# EAGLE board BoB_modul (EAGLE 7.7.0)
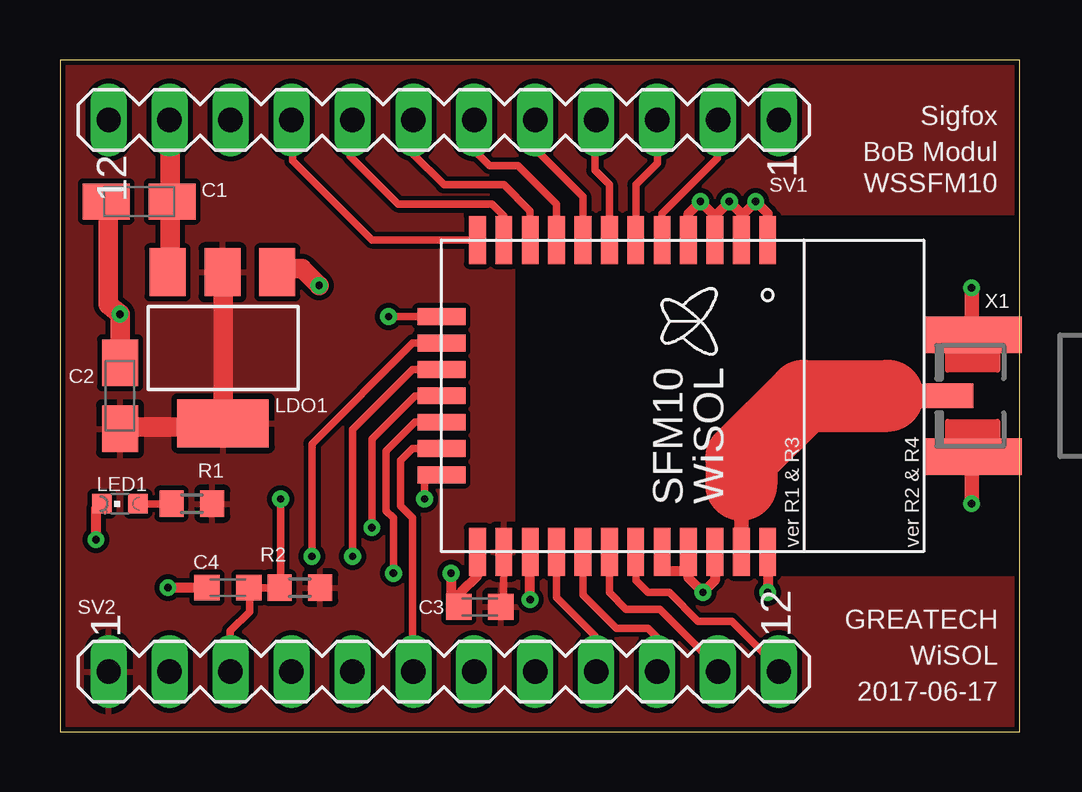
[diagram p0: board, top side]
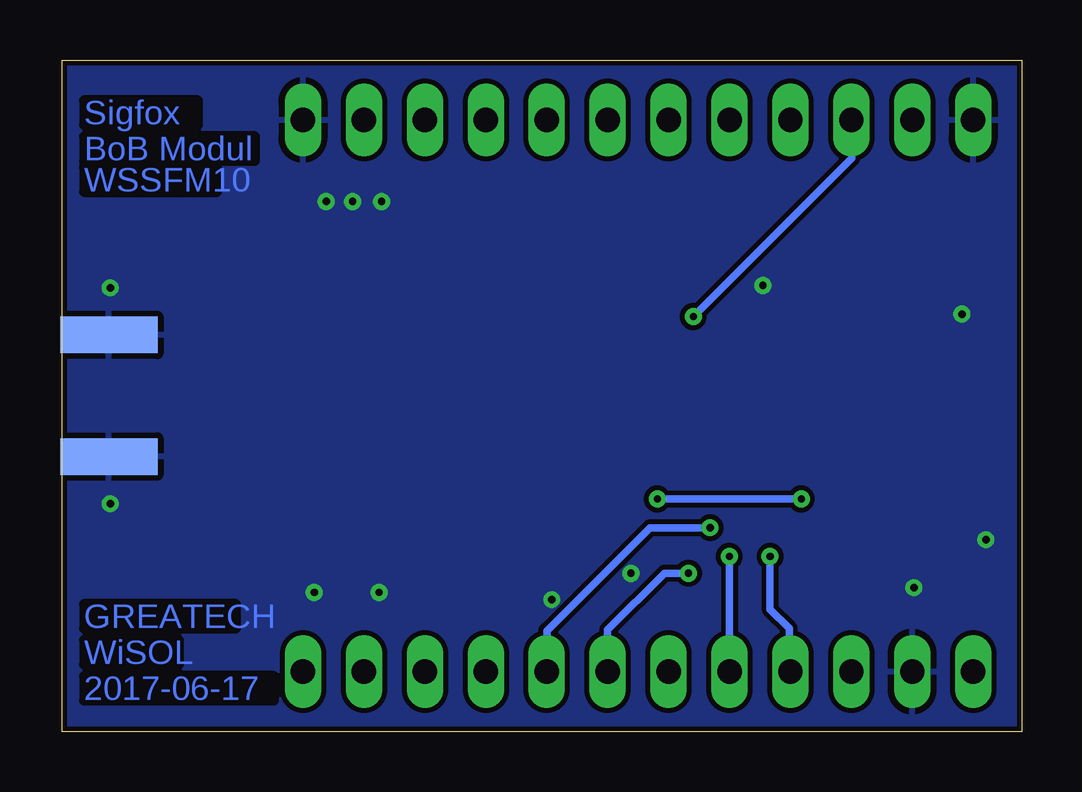
[diagram p1: board, bottom side, seen from below]

Size 40 x 28 mm. Coordinates in mm from the lower left corner, seen from the top.
Outline: 0,28 0,0 40,0 40,28 0,28
Copper layers (1*16): Top 0.035mm / dielectric 1.5mm / Bottom 0.035mm
Design rules "default *": minimum track width 10mil, minimum drill 24mil, track to track 8mil, track to pad 8mil, pad to pad 8mil, via to via 8mil, smd to smd 8mil, copper to edge 8mil, drill to drill 8mil, minimum pad ring 10mil, minimum via ring 8mil, stop-mask expansion 4mil, vias tented up to drill 0mil, thermal gap 10mil

## Footprints (pad centres in the part's own frame; a part is rotated, then mirrored left to right if it is on the bottom)
A/3216-18R = smd 1.95 x 1.5: + 1.375,0; - -1.375,0
C0603K = smd 1.05 x 1.08: 1 -0.875,0; 2 0.875,0
SOT223 = smd 1.499 x 2.007: 1 -2.261,-3.15; 2 0.025,-3.15; 3 2.311,-3.15 | smd 3.81 x 2.007: 4 0,3.15
CHIPLED_0603 = smd 0.8 x 0.8: A 0,-0.75; C 0,0.75
R0603 = smd 1 x 1.1: 1 -0.85,0; 2 0.85,0
MA12-1 = drill 1.016 long: 1 -13.97,0; 2 -11.43,0; 3 -8.89,0; 4 -6.35,0; 5 -3.81,0; 6 -1.27,0; 7 1.27,0; 8 3.81,0; 9 6.35,0; 10 8.89,0; 11 11.43,0; 12 13.97,0
WSSFM10 = smd 2 x 0.7: P$1 -6.5,6; P$2 -6.5,4.9; P$3 -6.5,3.8; P$4 -6.5,2.7; P$5 -6.5,1.6; P$6 -6.5,0.5; P$7 -6.5,-0.6; P$8 -6.5,-1.7; P$9 -6.5,-2.8; P$10 -6.5,-3.9; P$11 -6.5,-5; P$12 -6.5,-6.1; P$20 6.5,-6.1; P$21 6.5,-5; P$22 6.5,-3.9; P$23 6.5,-2.8; P$24 6.5,-1.7; P$25 6.5,-0.6; P$26 6.5,0.5; P$27 6.5,1.6; P$28 6.5,2.7; P$29 6.5,3.8; P$30 6.5,4.9; P$31 6.5,6 | smd 0.7 x 2: P$13 -3.3,-7.6; P$14 -2.2,-7.6; P$15 -1.1,-7.6; P$16 0,-7.6; P$17 1.1,-7.6; P$18 2.2,-7.6; P$19 3.3,-7.6
SMA_EDGELAUNCH_UFL = smd 4.064 x 1.524: GND@1 2.032,-2.54; GND@2 2.032,2.54 | smd 4.064 x 1.524 bottom: GND@3 2.032,2.54; GND@4 2.032,-2.54 | smd 2.032 x 1.016: P 3.048,0

## Placement (x,y rotation side)
C1  10u  [A/3216-18R]  3.3,22.1 0 top
C2  10u  [A/3216-18R]  2.5,14 270 top
C3  100n  [C0603K]  17.5,5.2 180 top
C4  100n  [C0603K]  7,6 180 top
LDO1  AME8815BEGT  [SOT223]  6.8,16 180 top
LED1  [CHIPLED_0603]  2.5,9.5 90 top
R1  470  [R0603]  5.5,9.5 0 top
R2  100k  [R0603]  10,6 0 top
SV1  [MA12-1]  16,25.5 180 top
SV2  [MA12-1]  16,2.5 0 top
WSSFM10  SFM10  [WSSFM10]  23.5,14 270 top
X1  [SMA_EDGELAUNCH_UFL]  40.1,14 180 top

## Library data of the parts
C1-C4 R1 R2 = resistor
LDO1 = _Jochen_2016-10-02
LED1 = led
SV1 SV2 = con-lstb; OC_FARNELL: unknown; OC_NEWARK: unknown
WSSFM10 = WiSOL
X1 = adafruit_microbuilder

## Nets
3V3: C2.+ C3.1 LDO1.2 LDO1.4 R1.2 R2.2 SV2.1 WSSFM10.P$21
5V: C1.+ LDO1.3 SV1.11
/RST: C4.1 R2.1 SV2.3 WSSFM10.P$19
CPU_LED: SV1.8 WSSFM10.P$11
DBG_CLK_TX_LED: SV2.7 WSSFM10.P$17
DBG_DATA_RX_LED: SV2.8 WSSFM10.P$16
DBG_EN_NC: SV2.6 WSSFM10.P$18
GND: C1.- C2.- C3.2 C4.2 LDO1.1 LED1.C SV1.1 SV1.12 SV2.2 WSSFM10.P$1 WSSFM10.P$2 WSSFM10.P$3 WSSFM10.P$4 WSSFM10.P$20 WSSFM10.P$22 WSSFM10.P$27 WSSFM10.P$28 WSSFM10.P$29 WSSFM10.P$31 X1.GND@1 X1.GND@2 X1.GND@3 X1.GND@4
GPIO0: SV2.9 WSSFM10.P$23
GPIO1: SV2.10 WSSFM10.P$24
GPIO2: SV2.11 WSSFM10.P$25
GPIO3: SV2.12 WSSFM10.P$26
GPIO4: SV1.7 WSSFM10.P$10
GPIO5: SV1.6 WSSFM10.P$9
GPIO6: SV1.5 WSSFM10.P$8
GPIO7: SV1.4 WSSFM10.P$7
GPIO8: SV1.3 WSSFM10.P$6
GPIO9: SV1.10 WSSFM10.P$13
N$1: LED1.A R1.1
N$2: WSSFM10.P$30 X1.P
RADIO_LED: SV1.9 WSSFM10.P$12
RX: SV2.5 WSSFM10.P$15
SYSCLK_NC: SV1.2 WSSFM10.P$5
TX: SV2.4 WSSFM10.P$14

## Tracks (layer width: path | path; a pad name or v marks a point on that pad's centre or on a via)
3V3
  Top 0.305: WSSFM10.P$21 18.5,5.39 C3.1 | LDO1.2 6.79,19.02 6.8,19 | C2.+ 2.52,12.62 2.6,12.7 | 6.6,12.7 LDO1.4
  Top 0.813: 6.8,19 LDO1.4 | 2.6,12.7 6.6,12.7
  pour Top (isolate 0.178): 0,0 0,28 40,28 40,21.6 18.9,21.6 18.9,6.4 40,6.4 40,0
5V
  Top 0.305: SV1.11 4.6,25.4 | 4.6,22.3 C1.+ 4.6,21.9 | LDO1.3 4.69,19.01 4.6,19.3
  Top 0.813: 4.6,25.4 4.6,22.3 | 4.6,19.3 4.6,21.9
/RST  (via drill 0.3)
  Top 0.305: v9.2,9.7 9.2,6.1 R2.1 C4.1 7.88,5.92 7.9,5.9 7.9,5 7.1,4.2 SV2.3 | WSSFM10.P$19 15.4,10.7 15.2,10.5 v15.2,9.7
  Bottom 0.305: v15.2,9.7 v9.2,9.7
CPU_LED
  Top 0.305: SV1.8 12.1,25.41 12.1,25.4 12.1,24 14.1,22 18,22 18.5,21.5 WSSFM10.P$11
DBG_CLK_TX_LED  (via drill 0.3)
  Top 0.305: WSSFM10.P$17 14.8,12.9 13.6,11.7 13.6,9.2 13.9,8.9 v13.9,6.6
  Bottom 0.305: v13.9,6.6 14.9,6.6 17.27,4.23 SV2.7
DBG_DATA_RX_LED  (via drill 0.3)
  Top 0.305: WSSFM10.P$16 14.8,14 13,12.2 v13,8.5
  Bottom 0.305: v13,8.5 15.5,8.5 19.8,4.2 SV2.8
DBG_EN_NC
  Top 0.305: WSSFM10.P$18 14.7,11.8 14.2,11.3 14.2,9.4 14.7,8.9 14.7,2.53 SV2.6
GND  (via drill 0.3)
  Top 0.305: 17.4,7.3 17.41,7.51 WSSFM10.P$20 17.39,7.04 | LDO1.1 9.1,19.3 9,19.3 | C1.- 1.93,21.98 2,21.9 | WSSFM10.P$22 19.59,7.46 | X1.GND@2 38,11.4 | X1.GND@4 38,16.5 | 16.3,5.4 16.52,5.4 C3.2 16.7,5.28 | WSSFM10.P$2 28.4,21.5 | WSSFM10.P$27 25.1,6.7
  Top 0.406: 17.4,7.3 17.4,6.5 16.7,5.8 16.7,5.28 | C4.2 v4.5,6 | v1.5,8 1.5,9.3 LED1.C | 29.5,7.96 WSSFM10.P$31 v29.5,5.8 | v16.3,6.6 16.3,5.4 | v19.6,5.5 WSSFM10.P$22 | WSSFM10.P$4 26.2,21.6 v26.7,22.1 27.3,21.5 | WSSFM10.P$1 29.5,21.6 v29,22.1 28.4,21.5 | WSSFM10.P$3 27.3,21.5 | 27.3,21.5 v27.9,22.1 28.4,21.6 WSSFM10.P$2 | WSSFM10.P$29 27.3,6.3 v26.8,5.8 26.2,6.4 26.2,6.7 | 26.2,6.7 WSSFM10.P$28 | 25.1,6.7 26.2,6.7
  Top 0.61: 38,11.4 v38,9.5 | 38,16.5 v38,18.5
  Top 0.813: 9.1,19.3 10.1,19.3 v10.8,18.6 | C2.- v2.5,17.4 2,17.8 2,21.9
  pour Bottom (isolate 0.178): 40,28 40,0 0,0 0,28
GPIO0
  Top 0.305: WSSFM10.P$23 20.7,5.6 22.3,4 22.3,2.7 22.35,2.65 SV2.9
GPIO1
  Top 0.305: WSSFM10.P$24 21.8,5.7 23.2,4.3 24.5,4.3 24.9,3.9 SV2.10
GPIO2
  Top 0.305: WSSFM10.P$25 22.9,5.8 23.6,5.1 25,5.1 27.43,2.67 SV2.11
GPIO3
  Top 0.305: WSSFM10.P$26 24,6.3 24.5,5.8 25.4,5.8 26.6,4.6 28,4.6 29.9,2.7 SV2.12
GPIO4
  Top 0.305: SV1.7 14.7,25.47 14.7,25.4 14.7,24.1 16,22.8 18.5,22.8 19.6,21.7 WSSFM10.P$10
GPIO5
  Top 0.305: SV1.6 17.3,25.47 17.3,25.2 17.3,24.2 17.9,23.6 19.1,23.6 20.7,22 WSSFM10.P$9
GPIO6
  Top 0.305: SV1.5 19.8,24.3 21.8,22.3 WSSFM10.P$8
GPIO7
  Top 0.305: SV1.4 22.35,25.25 22.3,25.2 22.3,23.4 22.9,22.8 WSSFM10.P$7
GPIO8
  Top 0.305: SV1.3 24.89,25.21 24.9,25.2 24.9,23.7 24,22.8 WSSFM10.P$6
GPIO9  (via drill 0.3)
  Top 0.305: v13.7,17.3 WSSFM10.P$13
  Bottom 0.305: SV1.10 7.1,23.9 v13.7,17.3
N$1
  Top 0.305: R1.1 LED1.A
N$2
  Top 0.61: 28.4,10.3 WSSFM10.P$30
  Top 1.016: 34.5,14 X1.P
  Top 3: 34.5,14 31,14 28.4,11.4 28.4,10.3
RADIO_LED
  Top 0.305: SV1.9 9.65,25.05 9.7,25 9.7,23.8 13,20.5 WSSFM10.P$12
RX  (via drill 0.3)
  Top 0.305: WSSFM10.P$15 14.7,15.1 12.2,12.6 v12.2,7.3
  Bottom 0.305: v12.2,7.3 12.2,2.6 SV2.5
SYSCLK_NC
  Top 0.305: SV1.2 27.43,25.43 27.4,25.4 27.4,23.9 25.1,21.6 WSSFM10.P$5
TX  (via drill 0.3)
  Top 0.305: WSSFM10.P$14 14.7,16.2 10.5,12 v10.5,7.3
  Bottom 0.305: v10.5,7.3 10.5,5.1 9.7,4.3 9.7,2.6 SV2.4

## Text on the board
Bottom: Sigfox | BoB Modul | WSSFM10 | GREATECH | WiSOL | 2017-06-17
tNames: Sigfox | BoB Modul | WSSFM10 | GREATECH | WiSOL | 2017-06-17